# EAGLE board MainBoard v1.3 (EAGLE 7.0.0)
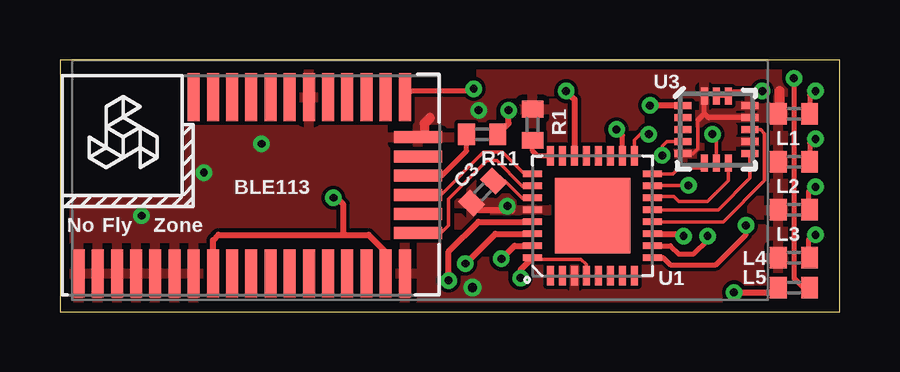
[diagram p0: board, top side]
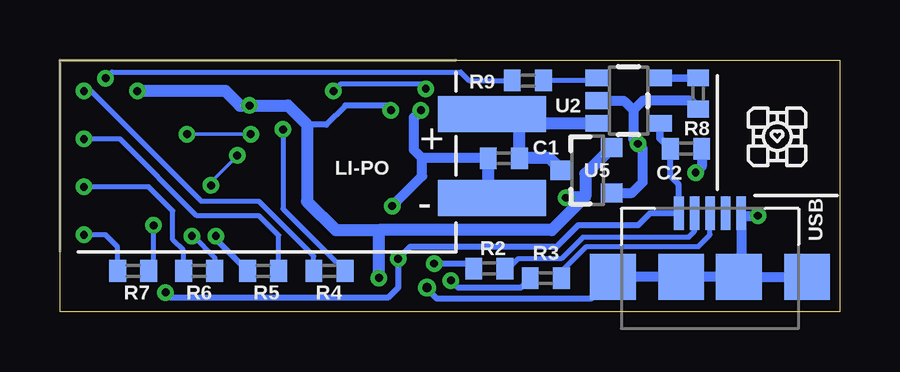
[diagram p1: board, bottom side, seen from below]

Size 32.5 x 10.5 mm. Coordinates in mm from the lower left corner, seen from the top.
Outline: 0,0 32.5,0 32.5,10.5 0,10.5 0,0
Copper layers (1*16): top 0.0356mm / dielectric 1.5011mm / Bottom 0.0356mm
Design rules "OSH *": minimum track width 6mil, minimum drill 13mil, track to track 6mil, track to pad 6mil, pad to pad 6mil, via to via 6mil, smd to smd 6mil, copper to edge 15mil, drill to drill 6mil, minimum pad ring 7mil, minimum via ring 7mil, stop-mask expansion 3mil, vias tented up to drill 0mil, thermal gap 10mil

## Footprints (pad centres in the part's own frame; a part is rotated, then mirrored left to right if it is on the bottom)
BLUETOOTHNS = smd 2 x 0.5: P$1 0.9,-0.675; P$2 0.9,-1.475; P$3 0.9,-2.275; P$4 0.9,-3.075; P$5 0.9,-3.875; P$6 0.9,-4.675; P$7 0.9,-5.475; P$8 0.9,-6.275; P$9 0.9,-7.075; P$10 0.9,-7.875; P$11 0.9,-8.675; P$12 0.9,-9.475; P$13 0.9,-10.275; P$14 0.9,-11.075; P$15 0.9,-11.875; P$16 0.9,-12.675; P$17 0.9,-13.475; P$18 0.9,-14.275; P$19 8.25,-5.475; P$20 8.25,-6.275; P$21 8.25,-7.075; P$22 8.25,-7.875; P$23 8.25,-8.675; P$24 8.25,-9.475; P$25 8.25,-10.275; P$26 8.25,-11.075; P$27 8.25,-11.875; P$28 8.25,-12.675; P$29 8.25,-13.475; P$30 8.25,-14.275 | smd 0.5 x 2: P$31 2.575,-14.825; P$32 3.375,-14.825; P$33 4.175,-14.825; P$34 4.975,-14.825; P$35 5.775,-14.825; P$36 6.575,-14.825
LI-POLY_28 = smd 4.5 x 1.5: GND 18,-5.75; VDD 18,-2.25
C0402 = smd 0.7 x 0.9: 1 -0.65,0; 2 0.65,0
MICROUSB = smd 0.4 x 1.4: D+ 0,4.1; D- -0.65,4.1; GND 1.3,4.1; ID 0.65,4.1; VCC -1.3,4.1 | smd 1.9 x 1.9: GD1 -4.05,1.45; GD2 -1.2,1.45; GD3 1.2,1.45; GD4 4.05,1.45
R0402 = smd 0.7 x 0.9: 1 -0.65,0; 2 0.65,0
QFN-32 = smd 0.285 x 0.8: 1 -1.75,-2.5; 2 -1.25,-2.5; 3 -0.75,-2.5; 4 -0.25,-2.5; 5 0.25,-2.5; 6 0.75,-2.5; 7 1.25,-2.5; 8 1.75,-2.5; 17 1.75,2.5; 18 1.25,2.5; 19 0.75,2.5; 20 0.25,2.5; 21 -0.25,2.5; 22 -0.75,2.5; 23 -1.25,2.5; 24 -1.75,2.5 | smd 0.8 x 0.285: 9 2.5,-1.75; 10 2.5,-1.25; 11 2.5,-0.75; 12 2.5,-0.25; 13 2.5,0.25; 14 2.5,0.75; 15 2.5,1.25; 16 2.5,1.75; 25 -2.5,1.75; 26 -2.5,1.25; 27 -2.5,0.75; 28 -2.5,0.25; 29 -2.5,-0.25; 30 -2.5,-0.75; 31 -2.5,-1.25; 32 -2.5,-1.75 | smd 3.15 x 3.15: EP 0,0
SOT23-5 = smd 0.7 x 1: 1 -0.95,-1.3; 2 0,-1.3; 3 0.95,-1.3; 4 0.95,1.3; 5 -0.95,1.3
LGA16-3MM = smd 0.7 x 0.28: 1 -1.4,1; 2 -1.4,0.5; 3 -1.4,0; 4 -1.4,-0.5; 5 -1.4,-1; 9 1.4,-1; 10 1.4,-0.5; 11 1.4,0; 12 1.4,0.5; 13 1.4,1 | smd 0.28 x 0.7: 6 -0.5,-1.4; 7 0,-1.4; 8 0.5,-1.4; 14 0.5,1.4; 15 0,1.4; 16 -0.5,1.4
SOT23-3 = smd 0.8 x 0.9: 1 -0.95,-1; 2 0.95,-1; 3 0,1.1

## Placement (x,y rotation side)
A1  BLE113-A  [BLUETOOTHNS]  0.1,0.7 90 top
BT  LI-POL_BAT  [LI-POLY_28]  32.5,10.5 0 bottom
C1  4.7uF  [C0402]  14,6.4 180 bottom
C2  4.7uF  [C0402]  6.4,6.8 0 bottom
C3  4.7uF  [C0402]  17.62,4.99 225 top
J1  MICROUSB  [MICROUSB]  5.4,0 0 bottom
L1  LED_0402  [R0402]  30.6,8.25 0 top
L2  LED_0402  [R0402]  30.6,6.25 0 top
L3  LED_0402  [R0402]  30.6,4.25 0 top
L4  LED_0402  [R0402]  30.6,2.25 0 top
L5  LED_0402  [R0402]  30.6,1 180 top
R1  [R0402]  19.7,7.8 270 top
R2  22ohm  [R0402]  14.6,1.8 180 bottom
R3  22ohm  [R0402]  12.25,1.4 180 bottom
R4  220ohm  [R0402]  21.27,1.7 180 bottom
R5  220ohm  [R0402]  24.03,1.7 0 bottom
R6  220ohm  [R0402]  26.7,1.7 180 bottom
R7  220ohm  [R0402]  29.45,1.7 180 bottom
R8  67K  [R0402]  5.9,9.1 270 bottom
R9  220ohm  [R0402]  12.99,9.64 180 bottom
R11  [R0402]  17.6,7.4 180 top
U1  ATMEGA32U2QFN  [QFN-32]  22.2,4 0 top
U2  MCP738312  [SOT23-5]  8.8,8.8 270 bottom
U3  LIS331  [LGA16-3MM]  27.36,7.59 0 top
U5  REGULATOR  [SOT23-3]  10.5,5.9 90 bottom

## Library data of the parts
A1 BT C1-C3 J1 L1-L5 R1-R9 R11 U1 U2 U5 = BitFit
U3 = SparkFun-Sensors

## Nets
+3V3: A1.P$8 A1.P$17 R11.1 U1.4 U1.32 U3.1 U3.14 U3.15 U5.2
+5V: C2.1 J1.VCC L5.2 U1.31 U2.4
GND: A1.P$1 A1.P$2 A1.P$3 A1.P$4 A1.P$5 A1.P$6 A1.P$7 A1.P$18 A1.P$25 A1.P$36 BT.GND C1.2 C2.2 C3.2 J1.GD1 J1.GD2 J1.GD3 J1.GD4 J1.GND L1.1 L2.1 L3.1 L4.1 R1.1 R8.2 U1.3 U1.28 U2.2 U3.5 U3.10 U3.12 U3.13 U3.16 U5.1
N$1: R3.2 U1.29
N$2: R2.2 U1.30
N$3: R1.2 U1.24
N$4: L1.2 R4.2
N$5: L2.2 R5.2
N$6: L3.2 R6.2
N$7: L4.2 R7.2
N$8: J1.D+ R3.1
N$9: J1.D- R2.1
N$10: BT.VDD C1.1 U2.3 U5.3
N$11: A1.P$34 R11.2
N$12: R8.1 U2.5
N$13: R9.1 U2.1
N$14: L5.1 R9.2
N$15: U1.12 U3.11
N$16: R4.1 U1.18
N$17: R6.1 U1.10
N$18: U1.15 U3.4
N$19: U1.14 U3.8
N$20: R5.1 U1.11
N$21: U1.16 U3.6
N$22: U1.17 U3.7
N$23: U1.13 U3.9
N$25: A1.P$31 U1.26
N$26: A1.P$30 U1.22
N$27: A1.P$33 U1.25
N$31: R7.1 U1.9
N$33: C3.1 U1.27

## Tracks (layer width: path | path; a pad name or v marks a point on that pad's centre or on a via)
+3V3  (via drill 0.33)
  top 0.152: 19.95,2.25 U1.32 19.76,2.19 21.73,2.19 21.95,1.96 U1.4 | U3.15 U3.14 28.07,9.2 v29.27,9.2
  top 0.254: A1.P$8 6.38,2.98 6.6,3.2 11.8,3.2 | 11.8,3.2 12.88,3.2 13.57,2.5 A1.P$17 | U1.32 19.2,1.75 v19.2,1.4 | U3.1 v24.6,8.6 | R11.1 18.7,7.85 v18.7,8.4 | 11.8,3.2 11.8,4.5 11.55,4.75 v11.4,4.75
  Bottom 0.254: v18.7,8.4 18.9,8.6 20.6,8.6 21.4,7.8 22.2,7.8
  Bottom 0.406: 10.6,4.8 11.35,4.8 v11.4,4.75
  Bottom 0.5: U5.2 10.6,5.75 10.6,4.8 12,3.4 19.2,3.4 | v29.27,9.2 25.6,9.2 25,8.6 25,8.59 24.99,8.6 v24.6,8.6 23,8.6 22.2,7.8 22.2,4.6 21,3.4 19.2,3.4 | v19.2,1.4 19.2,3.4
+5V  (via drill 0.33)
  top 0.203: 29.75,0.8 L5.2
  top 0.254: U1.31 18.95,2.75 v18.4,2.2 | v28.1,0.8 29.75,0.8
  Bottom 0.203: C2.1 7,6.85 | 7,6.85 7,7 | 7,6.85 7,6.6
  Bottom 0.254: C2.1 7.05,5.65 6.7,5.3 J1.VCC 7.9,4.1 8.4,3.6 10.9,3.6 11.8,2.7 17.9,2.7 v18.4,2.2 18.4,1 18.8,0.6 27.9,0.6 v28.1,0.8
  Bottom 0.305: C2.1 7.5,7.25 U2.4
  Bottom 0.32: 7,6.75 C2.1
GND  (via drill 0.33, 0.38)
  top 0.152: U3.5 26.39,6.59 26.6,6.8 26.6,8
  top 0.203: 26.6,8 26.86,8.27 | 26.86,8.27 U3.16 | U3.12 27.04,8.09 26.86,8.27
  top 0.254: 18.85,4.2 v18.65,4.4 18.5,4.25 17.44,4.25 C3.2 | A1.P$36 15.2,7.55 15.2,7.6
  top 0.381: 15.2,7.85 15.2,7.6 15.2,7.4
  top 0.406: 15.43,8.07 15.2,7.85 | L1.1 30,8.3 30,9.2
  Bottom 0.254: J1.GND 4,4 | v17.2,1 17.2,0.95 16.8,0.55 10.35,0.55 J1.GD1 | 4.1,1.55 J1.GD3
  Bottom 0.406: C2.2 5.75,6.05 v6,5.8 | R8.2 6.25,8.8 8.2,8.8 8.6,8.4 | 8.6,8.4 8.6,7.2 v8.4,7 8.2,6.8 8.2,5.4 8.65,4.95 U5.1 | U2.2 9,8.8 8.6,8.4 | 4,4 v3.4,4 | C1.2 17.4,6.4 | v18.65,4.4 17.4,5.65 17.4,6.4 | 17.4,6.4 17.75,6.75 17.75,8.1 v17.45,8.4 | J1.GND 4.1,1.55 | J1.GD1 J1.GD2 J1.GD3 J1.GD4
  Bottom 0.5: 14.6,5.2 14.6,4.85 BT.GND 14.65,4.9 C1.2
  pour top: 0,4.6 5.4,4.6 5.4,10.6 32.6,10.6 32.6,-0.2 0,0
N$1  (via drill 0.33)
  top 0.254: v16.2,1.3 16.2,2.51 17.44,3.75 U1.29
  Bottom 0.254: v16.2,1.3 15.9,1 13.3,1 R3.2
N$2  (via drill 0.33)
  top 0.254: U1.30 18.15,3.25 v16.9,2
  Bottom 0.203: 15.4,2 15.25,1.85 R2.2
  Bottom 0.254: 15.4,2 v16.9,2
N$3
  top 0.203: U1.24 19.9,6.5 19.7,6.7 R1.2
N$4  (via drill 0.33)
  top 0.203: 31.45,8.25 L1.2 31.25,9.05 31.4,9.2 v31.5,9.2
  Bottom 0.203: R4.2 21.92,2.32 24.2,4.6 26.6,4.6 31.2,9.2 v31.5,9.2
N$5  (via drill 0.33)
  top 0.203: L2.2 31.25,7.05 31.4,7.2 v31.5,7.2
  Bottom 0.203: R5.2 23.38,3.18 24.2,4 26.8,4 30,7.2 v31.5,7.2
N$6  (via drill 0.33)
  top 0.203: v31.5,5.2 31.4,5.2 31.2,5 31.2,4.3 L3.2
  Bottom 0.203: R6.2 27.35,2.55 27.8,3 27.8,4.2 28.8,5.2 v31.5,5.2
N$7  (via drill 0.33)
  top 0.203: v31.5,3.2 31.4,3.2 31.2,3 31.2,2.3 L4.2
  Bottom 0.203: R7.2 30.1,2.7 30.6,3.2 v31.5,3.2
N$8
  Bottom 0.203: J1.D+ 5.4,3.2 5.9,2.7 10.57,2.7 11.6,1.67 R3.1
N$9
  Bottom 0.203: R2.1 13.8,1.8 13.4,2.2 11.6,2.2 10.7,3.1 6.3,3.1 6.05,3.35 J1.D-
N$10
  Bottom 0.5: 13.4,8 14.25,8 BT.VDD | U2.3 13.6,7.85 | 13.6,7.85 14.1,7.85 BT.VDD | 14.65,8.1 BT.VDD | 13.6,7.85 13.35,7.6 C1.1 12.1,6.4 U5.3
N$11
  top 0.203: A1.P$34 15.93,5.67 16.95,6.7 R11.2
N$12
  Bottom 0.32: R8.1 U2.5
N$13
  Bottom 0.152: U2.1 10.15,9.8 10.23,9.72
  Bottom 0.203: 10.23,9.72 10.31,9.64 R9.1
N$14  (via drill 0.33)
  top 0.203: v30.6,9.73 30.6,1.4 31,1 L5.1
  Bottom 0.203: R9.2 15.44,9.64 15.8,10 30.33,10 v30.6,9.73
N$15
  top 0.152: U1.12 27.66,3.75 29.37,5.46 29.37,7.43 29.21,7.59 U3.11
N$16  (via drill 0.33)
  top 0.203: U1.18 23.45,7.35 v23.2,7.6
  Bottom 0.203: v23.2,7.6 23.2,4.28 R4.1
N$17  (via drill 0.33)
  top 0.203: U1.10 25.45,2.75 25.8,2.4 26.4,2.4 27,3 v27,3.15
  Bottom 0.203: R6.1 26.05,2.25 26.95,3.15 v27,3.15
N$18  (via drill 0.33)
  top 0.152: 24.8,5.2 24.75,5.2 arc-90 U1.15 24.71,5.26 v26.2,5.26 | U3.4 25.29,7.09 25.11,6.91 v25.11,6.51
  Bottom 0.152: v26.2,5.26 26.2,5.4 25.11,6.49 v25.11,6.51
N$19
  top 0.152: U1.14 24.75,4.8 25.6,4.8 25.81,4.59 26.99,4.59 27.86,5.46 U3.8 27.86,5.92
N$20  (via drill 0.33)
  top 0.203: 25.95,3.25 26,3.2 v26,3.15
  top 0.254: U1.11 25.95,3.25
  Bottom 0.254: v26,3.15 26,3.02 R5.1
N$21
  top 0.152: 24.75,5.8 U1.16 25.55,5.75 25.8,6 26.8,6
  top 0.203: 26.8,6 26.86,6.07 U3.6
N$22  (via drill 0.33)
  top 0.152: U1.17 24,6.55 24,6.6 | 23.95,6.75 U1.17 | U3.7 27.36,7.24 v27.2,7.4 | v24.55,7.4 24.2,7.4 23.95,7.15 U1.17
  Bottom 0.152: v27.2,7.4 v24.55,7.4
N$23
  top 0.152: U1.13 27.45,4.25 28.77,5.57 U3.9
N$25
  top 0.152: U1.26 19.27,5.25 18.22,6.3 17.8,6.3 16.2,4.71 16.2,3.6 15.88,3.27 A1.P$31
N$26  (via drill 0.33)
  top 0.203: 14.43,9 14.62,9.2 17.15,9.2 v17.25,9.3
  top 0.254: A1.P$30 14.43,9 | U1.22 21.45,8.85 v21.1,9.2
  Bottom 0.203: v17.25,9.3 17.45,9.5 20.8,9.5 v21.1,9.2
N$27
  top 0.152: U1.25 19.37,5.75 18.45,6.67 17.66,6.67 15.88,4.88 A1.P$33
N$31  (via drill 0.33)
  top 0.203: U1.9 25.15,2.25 25.45,1.95 27.35,1.95 28.6,3.2 v28.6,3.6
  Bottom 0.203: R7.1 28.6,1.9 v28.6,3.6
N$33
  top 0.152: U1.27 19.25,4.75 18.55,5.45 C3.1

## Text on the board
tPlace: U3 | L1 | R1 | R11 | L2 | BLE113 | C3 | L3 | L4 | L5 | U1
bPlace: R9 | U2 | R8 | C1 | C2 | U5 | LI-PO | USB | R3 | R2 | R4 | R5 | R6 | R7